# EAGLE board Meta-ProtoTrinket (EAGLE 6.4)
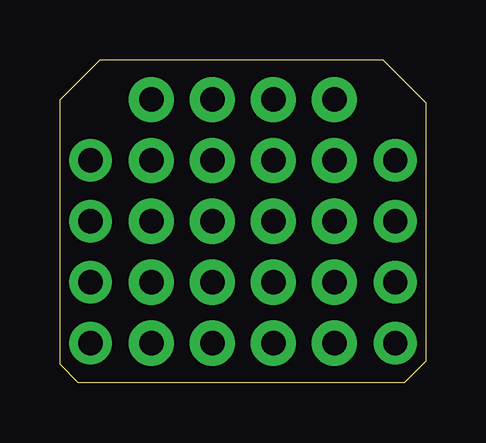
[diagram p0: board, top side]
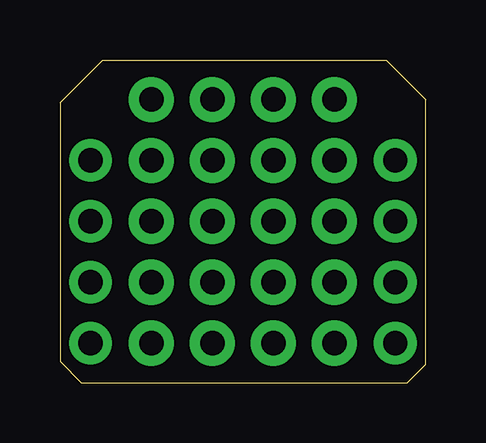
[diagram p1: board, bottom side, seen from below]

Size 15.24 x 13.46 mm. Coordinates in mm from the lower left corner, seen from the top.
Outline: 15.24,11.68 15.24,0.89 14.35,0 0.76,0 0,0.76 0,11.81 1.65,13.46 13.46,13.46 15.24,11.68
Copper layers (1*16): Top 0.035mm / dielectric 1.5mm / Bottom 0.035mm
Design rules "adafruit *": minimum track width 8mil, minimum drill 15.5mil, track to track 10mil, track to pad 10mil, pad to pad 10mil, via to via 10mil, smd to smd 8mil, copper to edge 10mil, drill to drill 8mil, minimum pad ring 10mil, minimum via ring 8mil, stop-mask expansion 4mil, vias tented up to drill 20mil, thermal gap 10mil
Net classes: 1 power: width 0.305 mm

## Footprints (pad centres in the part's own frame; a part is rotated, then mirrored left to right if it is on the bottom)
1X04-CLEANBIG = drill 1.016 pad 1.778: 1 -3.81,0; 2 -1.27,0; 3 1.27,0; 4 3.81,0
1X05_NO_SILK = drill 1.016 pad 1.88: 1 0,0; 2 2.54,0; 3 5.08,0; 4 7.62,0; 5 10.16,0

## Placement (x,y rotation side)
CN3  1X4-CLEANBIG  [1X04-CLEANBIG]  1.27,5.46 90 top
CN4  1X4-CLEANBIG  [1X04-CLEANBIG]  13.97,5.46 90 top
JP1  [1X05_NO_SILK]  3.81,1.65 90 top
JP2  [1X05_NO_SILK]  11.43,1.65 90 top
JP3  [1X05_NO_SILK]  8.89,1.65 90 top
JP4  [1X05_NO_SILK]  6.35,1.65 90 top

## Library data of the parts
CN3 CN4 = adafruit
JP1-JP4 = SparkFun-Connectors

## Nets
B0: CN4.4
B1: CN4.3
B2: CN4.2
B3: CN3.2
B4: CN3.3
GND: CN3.4
RESET: CN3.1
VBUS: CN4.1

## Tracks (layer width: path | path; a pad name or v marks a point on that pad's centre or on a via)
B0
  Bottom 0.406: 13.97,9.14 CN4.4